# Altium PCB BuckBoostNew.PcbDoc
Units mil, origin at the board's own origin, x right, y up, seen from the top; angles counter-clockwise.
Board outline 2320 x 670 mil, 2 copper layers (Top Layer, Bottom Layer); 9 components, 6 nets, 27 pads, 3 vias.
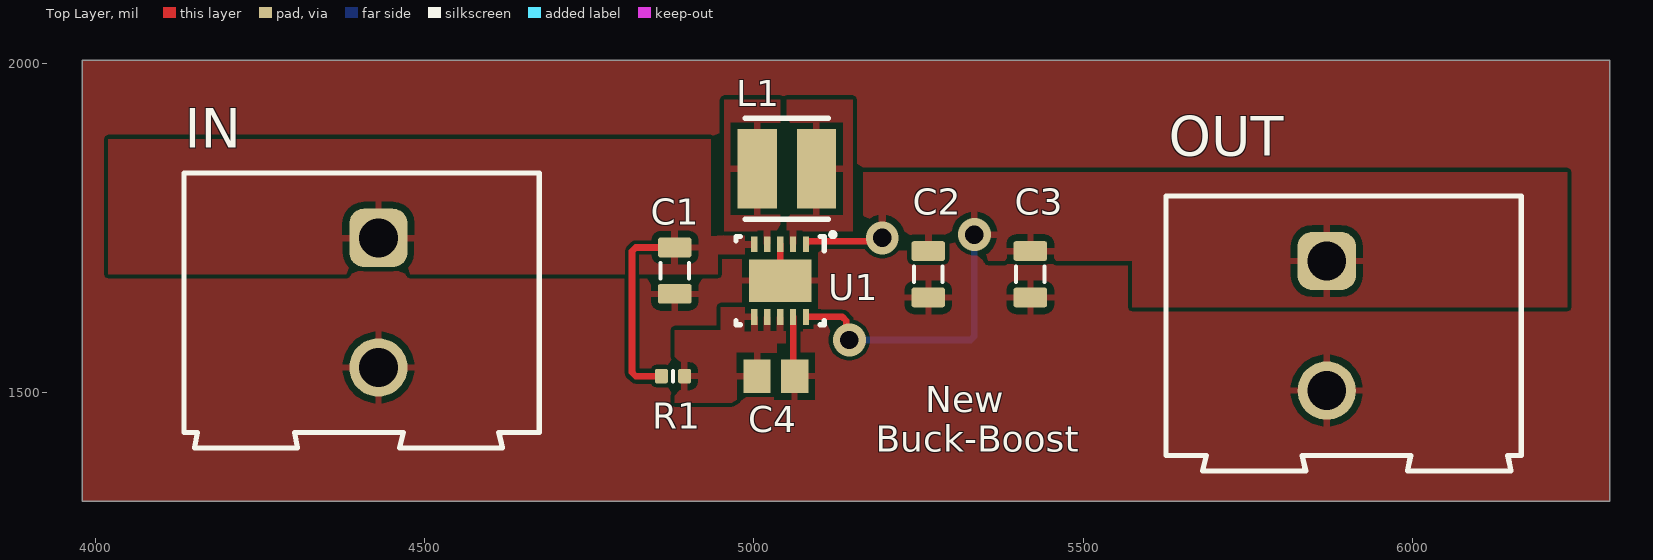
[diagram p0: Top Layer view]
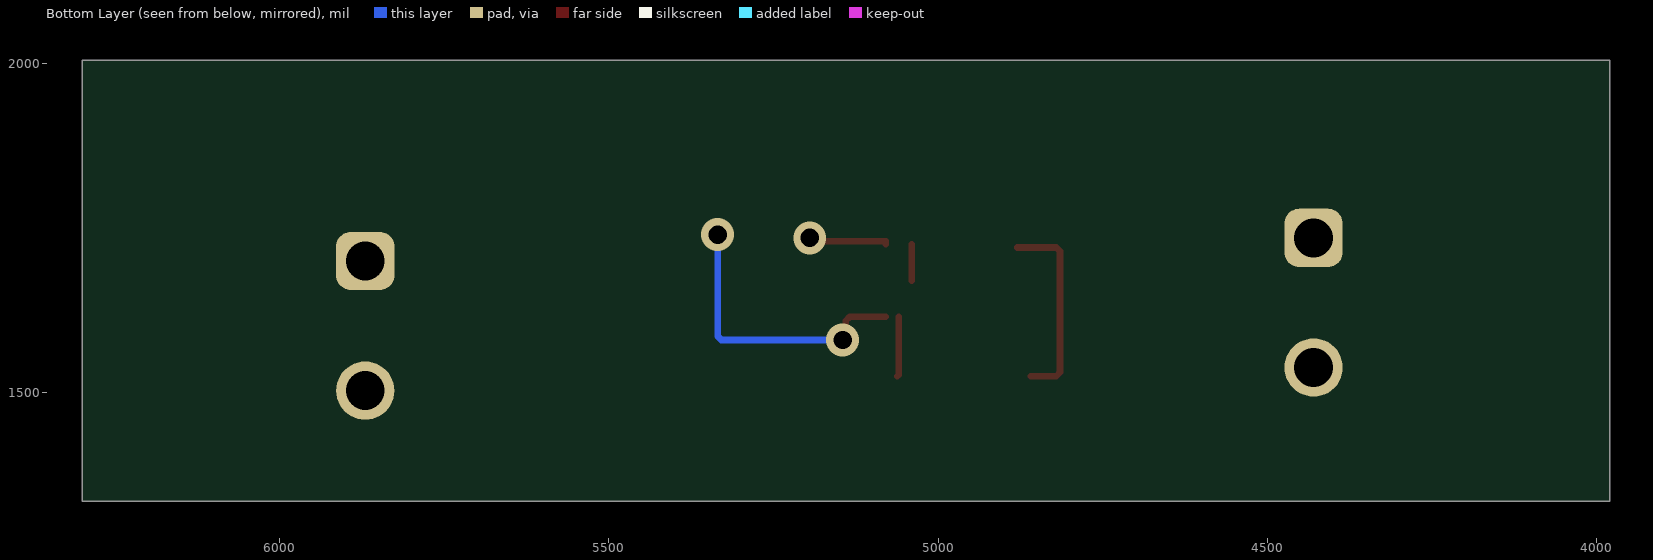
[diagram p1: Bottom Layer view, seen from below]
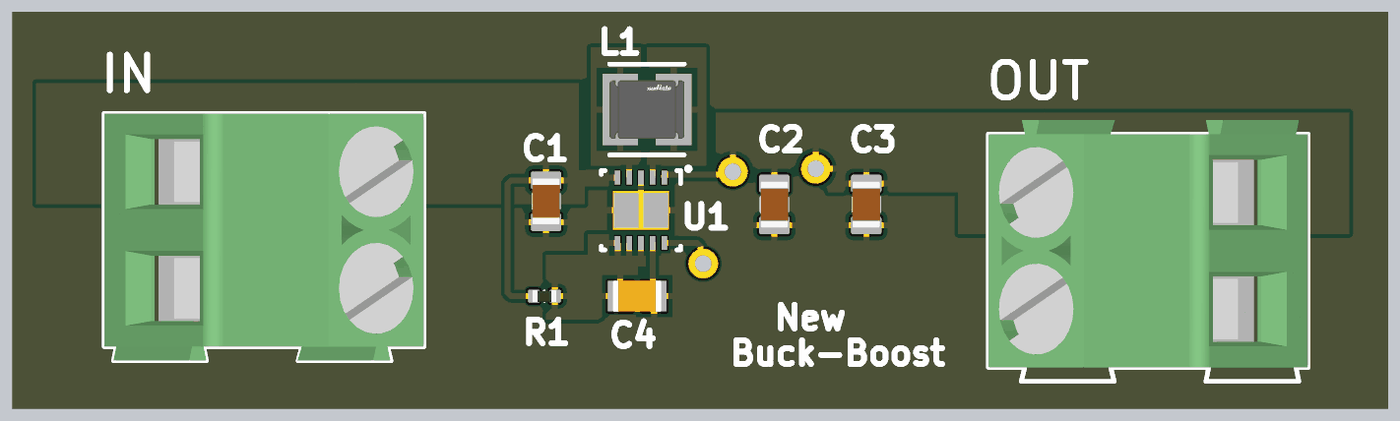
[diagram p2: 3D render of the assembled board from above, using the file's embedded part models]

## Layer stack, top to bottom
Top Solder: solder mask 0.4, Solder Resist, Dk 3.5
Top Layer: signal copper 1.4
Dielectric 1: dielectric 12.6, FR-4, Dk 4.8
Bottom Layer: signal copper 1.4
Bottom Solder: solder mask 0.4, Solder Resist, Dk 3.5

## Board outline
3980,1335 6300,1335 6300,2005 3980,2005

## Design rules (kind name [scope] priority, off if disabled: settings)
Clearance [All] p1: gap=6 ignorepadtopadclearanceinfootprint=FALSE
MinimumSolderMaskSliver [All] p1: minsoldermaskwidth=4
PolygonConnect [All] p1: connectstyle=Relief reliefconductorwidth=10 reliefentries=4 polygonreliefangle="90 Angle" airgapwidth=10
RoutingVias [All] p1: holewidth=28 width=50 viastyle="Through Hole" minholewidth=28 minwidth=50 maxholewidth=28 maxwidth=50
SilkToSilkClearance [All] p1: silktosilkclearance=6
SilkToSolderMaskClearance [IsPad] p1: minsilkscreentomaskgap=5 clearancetoexposedcopper=TRUE
SolderMaskExpansion [All] p1: expansion=4 istentingtop=FALSE
SupplyNets "Schematic Supply Nets" [InNet('GND')] p1: voltage=0.000
Width [All] p1: maxlimit=10 minlimit=10 preferedwidth=10
27 further rules are at their usual default settings.

## Components (designator, comment, footprint, x,y, rotation, side; value= is the part's Value field where it differs from the comment)
C1 "Capacitor 10µF +/-20% 25V 0805" CAPC0805(2012)145_L 4880,1685 r270 top value=10µF
C2 "Capacitor 10µF +/-20% 25V 0805" CAPC0805(2012)145_L 5265,1679.57 r270 top value=10µF
C3 "Capacitor 10µF +/-20% 25V 0805" CAPC0805(2012)145_L 5420,1679.57 r270 top value=10µF
C4 "Capacitor 100 nF +/-10% 50 V 0805" CAPC2013X95X50LL10T25 5033.54,1525 r0 top value=100nF
IN "691211720002" 691211720002#1 4404.41,1636.58 r270 top
L1 "2.2uH" FP-82103C-MFG 5050.08,1840 r0 top
OUT "691211720002" 691211720002#2 5895.59,1601.58 r270 top
R1 "Resistor 100R +/-1 % 0402 63 mW" RESC0402(1005)_L 4877.28,1525 r0 top value=100
U1 "TPS63001DRCR" DRC0010J 5040,1670 r270 top

## Footprints (in the part's own frame and the unit in brackets; to place one, negate y for a bottom-side part, rotate by r counter-clockwise, add the part's x,y. Pads: shape width x height; smd on the part's side, far side on the other; paste and mask are expansions set on the pad)
691211720002#1 [mm] "5,00mm - modular - green -45¡ã entry with rising cage clamp - 02p"
  rrect50% 2.25x2.25 hole 1.5: 1(-2.5,0.65)
  round 2.25 hole 1.5: 2(2.5,0.65)
  silkscreen extent -5,-6.85 5.6,6.85, body extent -5,-6.85 5.6,6.85, height 15.72
691211720002#2 [mm] "5,00mm - modular - green -45¡ã entry with rising cage clamp - 02p"
  rrect50% 2.25x2.25 hole 1.5: 1(-2.5,-0.65)
  round 2.25 hole 1.5: 2(2.5,-0.65)
  silkscreen extent -5,-6.85 5.6,6.85, body extent -5.6,-6.85 5,6.85, height 15.72
CAPC0805(2012)145_L [mm] "Chip Capacitor, Body 2.0x1.2mm, Height 1.45mm, IPC High Density"
  rrect25% 0.76x1.3 smd: 1(-0.9,0) 2(0.89,0)
  silkscreen extent -0.3,-0.55 0.3,0.55, body extent -1,-0.6 1,0.6, height 1.45
CAPC2013X95X50LL10T25 [mm] "Chip Capacitor, 2-Leads, Body 2.10x1.35mm, IPC High Density"
  rect 1.05x1.3 smd: 1(-0.725,0) 2(0.725,0)
  body extent -1.05,-0.67 1.05,0.67, height 0.95
DRC0010J [mm]
  rect 0.6x0.24 smd paste+0 mask+0.051: 1(-1.4,1) 2(-1.4,0.5) 3(-1.4,0) 4(-1.4,-0.5) 5(-1.4,-1) 6(1.4,-1) 7(1.4,-0.5) 8(1.4,0) 9(1.4,0.5) 10(1.4,1)
  rect 1.65x2.4 smd paste-1.187 mask+0.051: 11(0,0)
  silkscreen extent -1.83,-1.7 1.7,2.08
FP-82103C-MFG [mm]
  rect 1.52x3.05 smd paste+0 mask+0: 1(-1.145,0) 2(1.145,0)
  silkscreen extent -1.6,-1.95 1.6,1.95, body extent -2,-1.63 2,1.63, height 0.25
RESC0402(1005)_L [mm] "Chip Resistor, Body 1.0x0.5mm, IPC High Density"
  rrect25% 0.5x0.55 smd: 1(-0.45,0) 2(0.45,0)
  silkscreen extent 0,-0.2 0,0.2, body extent -0.5,-0.25 0.5,0.25, height 0.3

## Part data
C1 C2 C3: library part CMP-001-00079-4, "Chip Capacitor, 10µF +/-20%, 25V, 0805, Thickness 1.45 mm", Case/Package=0805, Max Operating Temperature=85°C, Min Operating Temperature=-55°C, Tolerance=10%, Voltage Rating=25V, Mounting Technology=SMT, Pins=2
C4: library part CMP-001-00018-6, "Chip Capacitor, 100 nF, +/- 10%, 50 V, 0805 (2012 Metric)", Capacitor Type=Ceramic, Case/Package=0805, Max Operating Temperature=125°C, Min Operating Temperature=-55°C, Tolerance=10%, Voltage Rating=50V, Mounting Technology=SM, Pins=2, RoHS Compliant=True
IN OUT: library part CMP-1502-02524-3, "211 Series 5MM Pitch Straight, Pcb Terminal Block, Through Hole, 2 Way", Color=Green, Current=10A, Max Operating Temperature=105°C, Min Operating Temperature=-40°C, Voltage=300V, Connector Type="PCB, Terminal Block", Contact Material=Brass, Contact Plating=Tin, Height=15.5mm, Housing Material=Nylon, Lead Pitch=5mm, Length=13.7mm, Mount="Through Hole", Number of Contacts=2, Number of Levels=1, Number of Pins=2, Number of Positions Per Level=2, Packaging=Box, Pitch=5.0038mm, Plating="Brass, Steel", REACH SVHC=Unknown, RoHS=Compliant, Stripping Length=-7mm, Termination=Screw, Width=10mm, Wire Gauge (Max)=24AWG, Wire Gauge (Min)=12AWG, Wire/Cable Gauge=12AWG
L1: library part CMP-20514-000001-1, "FIXED IND 10UH 500MA 400MOHM SMD", Case Code (Imperial)=1210, Case Code (Metric)=3225, Current Rating=500mA, DC Resistance (DCR)=400mR, Inductance=10uH, Max Operating Temperature=85°C, Min Operating Temperature=-40°C, Package Quantity=1, Resistor Type=Wirewound, Self Resonant Frequency=38MHz, Test Frequency=10kHz, Tolerance=10%, Case/Package=1210, DC Current=500mA, Depth=2.7mm, Height=2mm, Height - Seated (Max)=0.092inch, Length=0.126inch, Max DC Current=500mA, Military Standard=Not, Mount="Surface Mount", Packaging="Tape and Reel", Q Factor=35, Radiation Hardening=No, RoHS Compliant=Yes, Series=8200, Shielding=Unshielded, Termination=SMD/SMT, Width=0.098inch
R1: library part CMP-009-00167-3, "Chip Resistor, 100 Ohms, +/-1 %, 63 mW, -55 to 155 degC, 0402", Case/Package=0402, Max Operating Temperature=155°C, Min Operating Temperature=-55°C, Power=63mW, Tolerance=1%, Pins=2
U1: "96% Buck-Boost Converter with 1.7A Current Switches, 3.3V fixed Output voltage in 3x3 QFN 10-VSON -40 to 125", Alternate_PartNumber=TPS63001DRCT, Manufacturer="Texas Instruments", CompType=IC, Copyright="Copyright (C) 2025 Ultra Librarian. All rights reserved.", Manufacturer_Name="Texas Instruments", Manufacturer_Part_Number=TPS63001DRCR, MountType=SMT, PackageReference=DRC0010J, PartNumber=TPS63001DRCR, RefDes=RefDes, RoHS=Y, TYPE=TYPE

## Via types
v1: diameter 50, hole 28, Top Layer to Bottom Layer, 3 vias

## Nets (pads, with @x,y where several pads share a name; then routed paths per layer and width w, separated by ;. In a path a pad name is that pad's centre, name@x,y a point inside that pad or via, vN(x,y) a via of type N, cw(c..) or ccw(c..) an arc to the next point about the centre after c; other vN are vias at no path point)
GND: C1.2 C2.2 C3.2 C4.2 IN.2 OUT.2 U1.3 U1.9 U1.11 | length 146
  Top Layer w10: U1.11 U1.3 ; U1.9 5059.69,1527.4 C4.2
NetC1_1: C1.1 IN.1 R1.1 U1.5 | length 298.1
  Top Layer w10: R1.1 4820.86,1525 4815,1530.86 4815,1714.58 4820.86,1720.43 C1.1
NetC2_1: C2.1 C3.1 OUT.1 U1.1 U1.10 | length 563.2
  Top Layer w10: U1.1 5079.37,1729.78 5079.65,1730.06 5190.06,1730.06 v1(5195,1735) ; U1.10@5079.69,1615 5134.53,1615 5140.39,1609.14 5140.39,1584.61 v1(5145,1580)
  Bottom Layer w10: v1(5145,1580) 5329.14,1580 5335,1585.86 v1(5335,1740)
NetC4_1: C4.1 R1.2 U1.6 U1.7 U1.8
NetL1_1: L1.1 U1.4
NetL1_2: L1.2 U1.2

## Polygon pours and split planes (outlines as drawn)
NetC2_1 on Top Layer "NETC2_1_L01_P002" (solid, remove dead copper, pour order 2): 5070,1741.58 5070,1710 5145,1710 5145,1700 5560,1700 5570,1700 5575,1700 5575,1630 6235,1630 6235,1835 5165.88,1835 5165.88,1741.58
GND on Top Layer "GND_L01_P006" (solid, remove dead copper, pour order 6): 4010,2005 6300,2005 6300,1335 6285,1335 3980,1335 3980,2005
NetL1_2 on Top Layer "NETL1_2_L01_P000" (solid, remove dead copper, pour order 0): 5050,1745 5050,1710 5070,1710 5070,1745 5150,1745 5150,1945 5050,1945
NetC1_1 on Top Layer "NETC1_1_L01_P004" (solid, pour order 4): 5010,1742.33 5010,1710 4945,1710 4945,1680 4020,1680 4020,1885 4935,1885 4935,1737.33
NetC4_1 on Top Layer "NETC4_1_L01_P003" (solid, pour order 3): 5050,1630 5050,1575 5035,1575 5035,1485 4880,1485 4880,1595 4950,1595 4950,1630
NetL1_1 on Top Layer "NETL1_1_L01_P001" (solid, remove dead copper, pour order 1): 5030,1710 5010,1710 5010,1745 4955,1745 4955,1945 5040,1945 5040,1745 5030,1745

## Silkscreen, mask and mechanical layers (free items; w line width, h text height)
Top Overlay:
  text "New" at 5260,1470 h40
  text "Buck-Boost" at 5185,1410 h40